# EAGLE board Without_Optos (EAGLE 9.5.0)
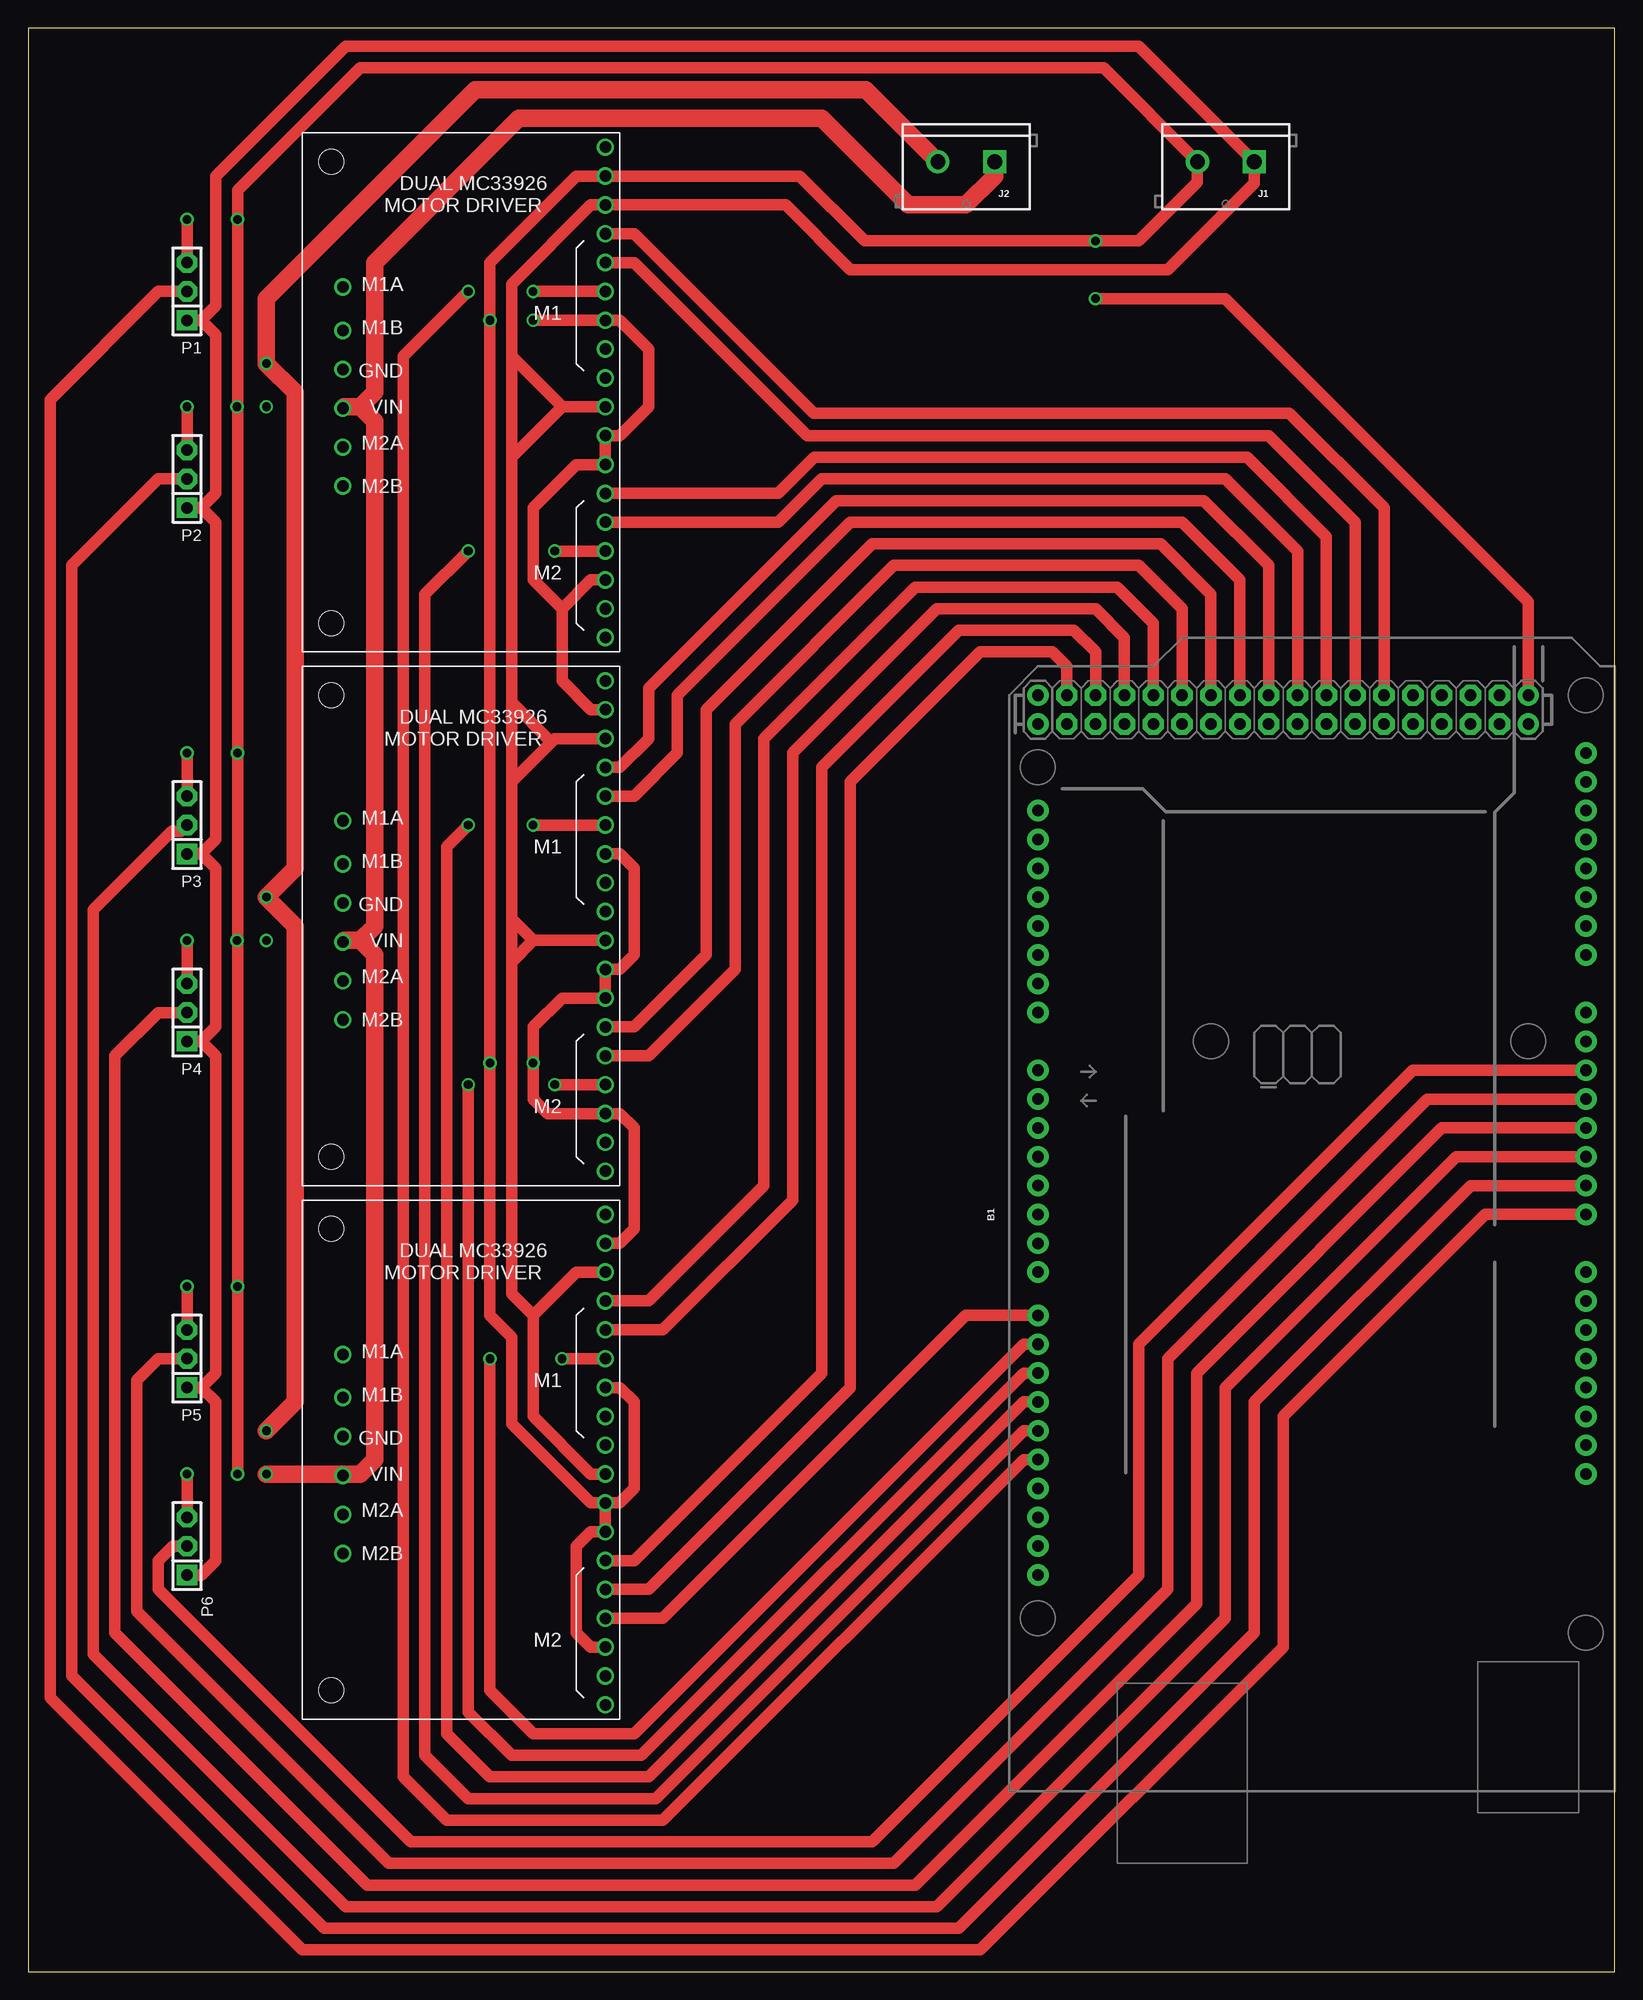
[diagram p0: board, top side]
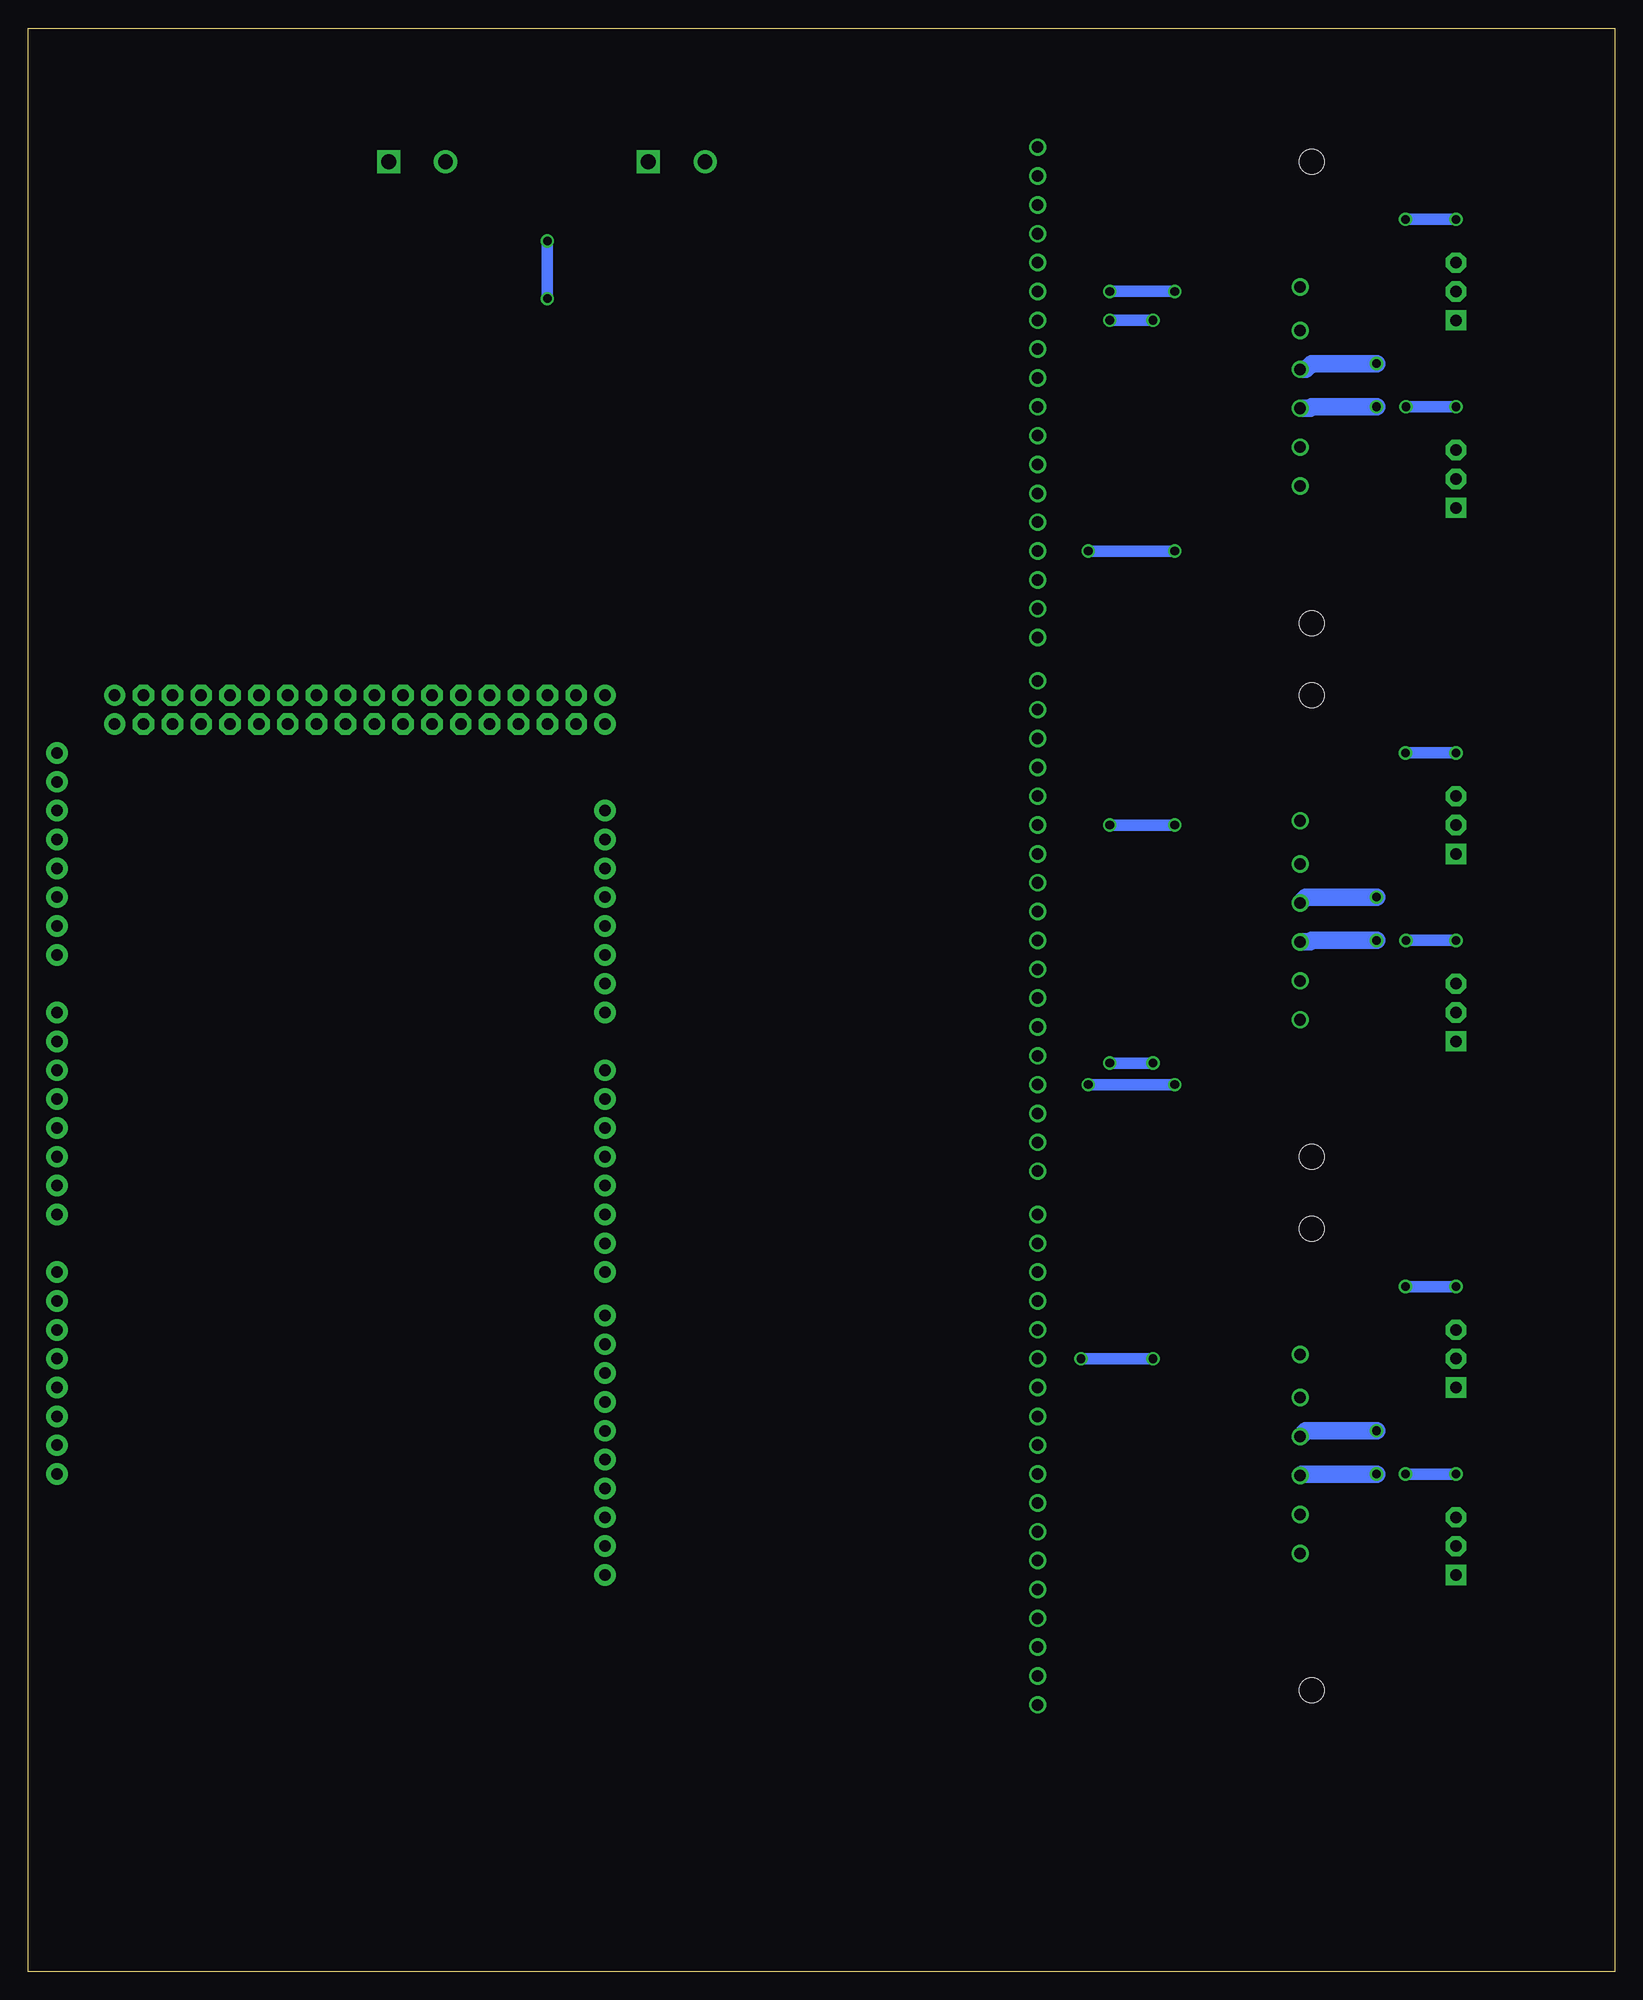
[diagram p1: board, bottom side, seen from below]

Size 139.68 x 171.12 mm. Coordinates in mm from the lower left corner, seen from the top.
Outline: 0,0 139.68,0 139.68,171.12 0,171.12 0,0
Copper layers (1*16): Top 0.035mm / dielectric 1.5mm / Bottom 0.035mm
Design rules "default": minimum track width 6mil, minimum drill 0.35mm, track to track 6mil, track to pad 6mil, pad to pad 6mil, via to via 6mil, smd to smd 6mil, copper to edge 40mil, drill to drill 6mil, minimum pad ring 10mil, minimum via ring 8mil, stop-mask expansion 4mil, vias tented up to drill 0mil, thermal gap 10mil
Net classes: 0 default: width 1.016 mm, drill 0.762 mm, clearance 0.61 mm; 1 12v: width 1.524 mm, drill 0.762 mm, clearance 0.61 mm

## Footprints (pad centres in the part's own frame; a part is rotated, then mirrored left to right if it is on the bottom)
ARDUINO_MEGA_NO_SILK = drill 1.016 pad 1.88: 0 13.97,24.13; 1 11.43,24.13; 2 8.89,24.13; 3 6.35,24.13; 3.3V -13.97,-24.13; 4 3.81,24.13; 5 1.27,24.13; 5V -11.43,-24.13; 5V@1 44.45,24.13; 5V@2 46.99,24.13; 6 -1.27,24.13; 7 -3.81,24.13; 8 -7.62,24.13; 9 -10.16,24.13; 10 -12.7,24.13; 11 -15.24,24.13; 12 -17.78,24.13; 13 -20.32,24.13; 14 19.05,24.13; 15 21.59,24.13; 16 24.13,24.13; 17 26.67,24.13; 18 29.21,24.13; 19 31.75,24.13; 20 34.29,24.13; 21 36.83,24.13; A0 1.27,-24.13; A1 3.81,-24.13; A2 6.35,-24.13; A3 8.89,-24.13; A4 11.43,-24.13; A5 13.97,-24.13; A6 16.51,-24.13; A7 19.05,-24.13; A8 24.13,-24.13; A9 26.67,-24.13; A10 29.21,-24.13; A11 31.75,-24.13; A12 34.29,-24.13; A13 36.83,-24.13; A14 39.37,-24.13; A15 41.91,-24.13; AREF -25.4,24.13; GND -8.89,-24.13; GND@1 -6.35,-24.13; GND@2 44.45,-19.05; GND@3 46.99,-19.05; GND@4 -22.86,24.13; IOREF -19.05,-24.13; NC -21.59,-24.13; RESET -16.51,-24.13; SCL -30.48,24.13; SDA -27.94,24.13; VIN -3.81,-24.13 | drill 1.016 pad 1.88 octagon: 22 44.45,21.59; 23 46.99,21.59; 24 44.45,19.05; 25 46.99,19.05; 26 44.45,16.51; 27 46.99,16.51; 28 44.45,13.97; 29 46.99,13.97; 30 44.45,11.43; 31 46.99,11.43; 32 44.45,8.89; 33 46.99,8.89; 34 44.45,6.35; 35 46.99,6.35; 36 44.45,3.81; 37 46.99,3.81; 38 44.45,1.27; 39 46.99,1.27; 40 44.45,-1.27; 41 46.99,-1.27; 42 44.45,-3.81; 43 46.99,-3.81; 44 44.45,-6.35; 45 46.99,-6.35; 46 44.45,-8.89; 47 46.99,-8.89; 48 44.45,-11.43; 49 46.99,-11.43; 50 44.45,-13.97; 51 46.99,-13.97; 52 44.45,-16.51; 53 46.99,-16.51
SCREWTERMINAL-5MM-2 = drill 1.3 pad 2.032 square: 1 0,0 | drill 1.3 pad 2.032: 2 5,0
SIP-100-03-40 = drill 1.016 pad 1.778 square: 1 -2.54,0 | drill 1.016 pad 1.778 octagon: 2 0,0; 3 2.54,0
DUALMC33926MOTORDRIVERCARRIER = drill 1.016: EN 1.27,24.13; GND 1.27,3.81; INV 1.27,29.21; M1D1 1.27,16.51; M1D2 1.27,13.97; M1FB 1.27,21.59; M1IN1 1.27,11.43; M1IN2 1.27,8.89; M1OUT1 24.384,13.589; M1OUT2 24.384,17.399; M1SF 1.27,19.05; M2D1 1.27,39.37; M2D2 1.27,36.83; M2FB 1.27,44.45; M2IN1 1.27,34.29; M2IN2 1.27,31.75; M2OUT1 24.384,27.686; M2OUT2 24.384,31.115; M2SF 1.27,41.91; MGND 24.384,20.828; MVIN 24.384,24.257; SLEW 1.27,26.67; VDD 1.27,6.35; VIN 1.27,1.27 | hole 2.184: 25.4,2.54; 25.4,43.18

## Placement (x,y rotation side)
B1  ARDUINO_MEGA_R3FULL  [ARDUINO_MEGA_NO_SILK]  113.03,65.41 90 top
J1  [SCREWTERMINAL-5MM-2]  107.95,159.38 180 top
J2  [SCREWTERMINAL-5MM-2]  85.09,159.38 180 top
P1  M-1X03-SIP-100-40  [SIP-100-03-40]  13.97,147.96 90 top
P2  M-1X03-SIP-100-40  [SIP-100-03-40]  13.97,131.44 90 top
P3  M-1X03-SIP-100-40  [SIP-100-03-40]  13.97,100.97 90 top
P4  M-1X03-SIP-100-40  [SIP-100-03-40]  13.97,84.45 90 top
P5  M-1X03-SIP-100-40  [SIP-100-03-40]  13.97,53.98 90 top
P6  M-1X03-SIP-100-40  [SIP-100-03-40]  13.97,37.47 90 top
PH2  DUALMC33926MOTORDRIVERCARRIER  [DUALMC33926MOTORDRIVERCARRIER]  52.07,114.94 180 top
PH3  DUALMC33926MOTORDRIVERCARRIER  [DUALMC33926MOTORDRIVERCARRIER]  52.07,161.93 180 top
U$1  DUALMC33926MOTORDRIVERCARRIER  [DUALMC33926MOTORDRIVERCARRIER]  52.07,67.94 180 top

## Library data of the parts
B1 = SparkFun-Boards
J1 J2 = SparkFun-Connectors; SF_SKU: PRT-08432
P1-P6 = con-headers-jp
PH2 PH3 U$1 = Pololu_Drivers

## Nets
12V [12v]: J2.1 PH2.MVIN PH3.MVIN U$1.MVIN
+5V: J1.1 P1.1 P2.1 P3.1 P4.1 P5.1 P6.1 PH2.EN PH2.VDD PH3.EN PH3.VDD U$1.EN U$1.VDD
GND: B1.GND B1.GND@3 B1.GND@4 J1.2 P1.3 P2.3 P3.3 P4.3 P5.3 P6.3 PH2.GND PH2.INV PH2.M1D1 PH2.M2D1 PH2.SLEW PH3.GND PH3.INV PH3.M1D1 PH3.M2D1 PH3.SLEW U$1.GND U$1.INV U$1.M1D1 U$1.M2D1 U$1.SLEW
M1A: B1.23 U$1.M2IN1
M1B: B1.25 U$1.M2IN2
M1POT: B1.A0 P1.2
M1PWM: B1.8 U$1.M2D2
M2A: B1.27 U$1.M1IN1
M2B: B1.29 U$1.M1IN2
M2POT: B1.A1 P2.2
M2PWM: B1.9 U$1.M1D2
M3A: B1.31 PH2.M2IN1
M3B: B1.33 PH2.M2IN2
M3POT: B1.A2 P3.2
M3PWM: B1.10 PH2.M2D2
M4A: B1.35 PH2.M1IN1
M4B: B1.37 PH2.M1IN2
M4POT: B1.A3 P4.2
M4PWM: B1.11 PH2.M1D2
M5A: B1.39 PH3.M2IN1
M5B: B1.41 PH3.M2IN2
M5POT: B1.A4 P5.2
M5PWM: B1.12 PH3.M2D2
M6A: B1.43 PH3.M1IN1
M6B: B1.45 PH3.M1IN2
M6POT: B1.A5 P6.2
M6PWM: B1.13 PH3.M1D2
PHGND: J2.2 PH2.MGND PH3.MGND U$1.MGND

## Tracks (layer width: path | path; a pad name or v marks a point on that pad's centre or on a via)
12V  (via drill 0.76)
  Top 1.524: v20.95,43.81 29.21,43.81 30.48,45.09 30.48,89.53 29.21,90.81 | 29.21,90.81 27.81,90.81 PH2.MVIN | 29.21,90.81 30.48,92.08 30.48,136.53 29.21,137.79 | 29.21,137.79 27.81,137.79 PH3.MVIN | 29.21,137.79 30.48,139.06 30.48,150.5 43.18,163.19 69.85,163.19 77.47,155.57 82.55,155.57 85.09,158.12 J2.1
  Bottom 1.524: U$1.MVIN 27.56,43.81 v20.95,43.81 | PH2.MVIN 26.8,90.68 26.67,90.81 v20.95,90.81 | PH3.MVIN 26.8,137.67 26.67,137.79 v20.95,137.79
+5V
  Top 1.016: U$1.EN 49.53,43.81 44.45,48.9 44.45,57.78 | 44.45,57.78 48.26,61.59 U$1.VDD | 44.45,57.78 42.55,59.69 42.55,88.9 | 42.55,88.9 42.55,92.71 | 42.55,92.71 42.55,104.78 | PH2.EN 44.45,90.81 | 44.45,90.81 42.55,88.9 | 44.45,90.81 42.55,92.71 | PH2.VDD 46.35,108.58 46.04,108.27 | 42.55,104.78 46.04,108.27 | 42.55,104.78 42.55,111.76 | 46.04,108.27 42.55,111.76 | 42.55,133.35 46.99,137.79 | 46.99,137.79 PH3.EN | 42.55,111.76 42.55,133.35 | 42.55,142.24 42.55,148.59 49.53,155.57 PH3.VDD 66.67,155.57 72.39,149.86 100.33,149.86 107.95,157.48 J1.1 97.79,169.54 27.94,169.54 16.51,158.12 16.51,146.69 15.24,145.41 | 42.55,142.24 42.55,133.35 | 46.99,137.79 42.55,142.24 | 15.24,51.44 16.51,50.16 16.51,36.2 15.24,34.92 P6.1 | 15.24,51.44 16.51,52.7 16.51,80.64 15.24,81.92 | 15.24,81.92 16.51,83.19 16.51,97.16 15.24,98.42 | 15.24,98.42 16.51,99.69 16.51,127.64 15.24,128.91 | 15.24,128.91 16.51,130.18 16.51,144.15 15.24,145.41 | P1.1 15.24,145.41 | P5.1 15.24,51.44 | P4.1 15.24,81.92 | P3.1 15.24,98.42 | P2.1 15.24,128.91
GND  (via drill 0.76)
  Top 1.016: U$1.M2D1 49.53,28.57 48.26,29.84 48.26,37.47 49.53,38.73 U$1.INV U$1.SLEW | U$1.SLEW 52.07,41.27 53.34,42.55 53.34,50.16 52.07,51.44 U$1.M1D1 | U$1.SLEW 49.53,41.27 42.55,48.26 42.55,55.88 40.64,57.78 v40.64,80.01 v40.64,145.41 40.64,150.5 48.26,158.12 PH3.GND 67.94,158.12 73.66,152.4 v93.98,152.4 97.79,152.4 102.95,157.56 J1.2 94.69,167.64 29.21,167.64 18.41,156.84 v18.41,154.31 18.41,137.85 | U$1.GND 52.07,64.14 53.34,65.41 53.34,74.3 52.07,75.56 PH2.M2D1 45.72,75.56 44.45,76.83 v44.45,80.01 44.45,83.19 46.99,85.72 PH2.INV PH2.SLEW 52.07,88.27 53.34,89.53 53.34,97.16 52.07,98.42 PH2.M1D1 | PH2.GND 49.53,111.12 46.99,113.67 46.99,120.02 | 46.99,120.02 49.53,122.56 PH3.M2D1 | 46.99,120.02 44.45,122.56 44.45,128.91 48.26,132.72 PH3.INV PH3.SLEW 52.07,135.25 54.61,137.79 54.61,142.88 52.07,145.41 PH3.M1D1 v44.45,145.41 | P6.3 v13.97,43.81 | v18.41,43.81 v18.41,60.33 18.41,90.86 | 18.41,90.86 v18.41,107.31 18.41,137.85 | P2.3 v13.97,137.79 | P3.3 v13.97,107.31 | P4.3 v13.97,90.81 | v18.36,90.81 18.41,90.86 | P5.3 v13.97,60.33 | v18.36,137.79 18.41,137.85 | P1.3 v13.97,154.31 | v93.98,147.32 105.41,147.32 132.08,120.65 B1.GND@3
  Bottom 1.016: v44.45,145.41 v40.64,145.41 | v18.41,43.81 v13.97,43.81 | v13.97,107.31 v18.41,107.31 | v13.97,90.81 v18.36,90.81 | v18.41,60.33 v13.97,60.33 | v13.97,137.79 v18.36,137.79 | v13.97,154.31 v18.41,154.31 | v44.45,80.01 v40.64,80.01 | v93.98,152.4 v93.98,147.32
M1A
  Top 1.016: B1.23 91.44,114.94 90.17,116.2 83.82,116.2 72.39,104.78 72.39,51.44 54.61,33.66 U$1.M2IN1
M1B
  Top 1.016: B1.25 93.98,116.2 92.08,118.11 81.92,118.11 69.85,106.05 69.85,52.7 53.34,36.2 U$1.M2IN2
M1POT
  Top 1.016: B1.A0 128.27,66.67 110.49,48.9 110.49,28.57 83.82,1.91 24.13,1.91 1.91,24.13 1.91,138.43 11.43,147.96 P1.2
M1PWM
  Top 1.016: B1.8 82.55,57.78 55.88,31.11 U$1.M2D2
M2A
  Top 1.016: B1.27 96.52,117.47 93.98,120.02 80.01,120.02 67.31,107.31 67.31,67.94 55.88,56.52 U$1.M1IN1
M2B
  Top 1.016: B1.29 99.06,118.75 95.89,121.92 78.11,121.92 64.77,108.58 64.77,69.22 54.61,59.05 U$1.M1IN2
M2POT
  Top 1.016: B1.A1 127,69.22 107.95,50.16 107.95,29.84 81.92,3.81 26.04,3.81 3.81,26.04 3.81,123.83 11.43,131.44 P2.2
M2PWM  (via drill 0.76)
  Top 1.016: v40.64,53.98 40.64,24.77 44.45,20.95 53.34,20.95 87.63,55.24 B1.9 | v46.99,53.98 U$1.M1D2
  Bottom 1.016: v40.64,53.98 v46.99,53.98
M3A
  Top 1.016: PH2.M2IN1 54.61,80.64 62.23,88.27 62.23,109.86 76.2,123.83 97.79,123.83 101.6,120.02 B1.31
M3B
  Top 1.016: PH2.M2IN2 53.34,83.19 59.69,89.53 59.69,111.12 74.3,125.73 99.69,125.73 104.14,121.28 B1.33
M3POT
  Top 1.016: B1.A2 125.73,71.75 105.41,51.44 105.41,31.11 80.01,5.71 27.94,5.71 5.71,27.94 5.71,93.53 12.62,100.43 13.44,100.43 P3.2
M3PWM  (via drill 0.76)
  Top 1.016: v38.73,78.11 38.73,22.86 42.55,19.05 53.98,19.05 87.63,52.7 B1.10 | PH2.M2D2 v46.35,78.11
  Bottom 1.016: v46.35,78.11 v38.73,78.11
M4A
  Top 1.016: B1.35 106.68,122.56 101.6,127.64 72.39,127.64 57.15,112.39 57.15,107.31 53.34,103.5 PH2.M1IN1
M4B
  Top 1.016: PH2.M1IN2 52.07,106.05 54.61,108.58 54.61,113.03 71.12,129.54 103.5,129.54 109.22,123.83 B1.37
M4POT
  Top 1.016: B1.A3 124.46,74.3 102.87,52.7 102.87,32.38 78.11,7.62 29.84,7.62 7.62,29.84 7.62,80.64 11.43,84.45 P4.2
M4PWM  (via drill 0.76)
  Top 1.016: v38.73,100.97 36.83,99.06 36.83,20.95 40.64,17.14 54.61,17.14 87.63,50.16 B1.11 | PH2.M1D2 v44.45,100.97
  Bottom 1.016: v44.45,100.97 v38.73,100.97
M5A
  Top 1.016: PH3.M2IN1 66.04,127.64 69.85,131.44 105.41,131.44 111.76,125.09 B1.39
M5B
  Top 1.016: B1.41 114.3,126.36 107.31,133.35 69.22,133.35 66.04,130.18 PH3.M2IN2
M5POT
  Top 1.016: B1.A4 123.19,76.83 100.33,53.98 100.33,33.66 76.2,9.53 31.75,9.53 9.53,31.75 9.53,52.07 11.43,53.98 P5.2
M5PWM  (via drill 0.76)
  Top 1.016: v38.73,125.09 34.92,121.28 34.92,19.05 38.73,15.24 55.24,15.24 87.63,47.62 B1.12 | PH3.M2D2 v46.35,125.09
  Bottom 1.016: v46.35,125.09 v38.73,125.09
M6A
  Top 1.016: B1.43 116.84,127.64 109.22,135.25 68.58,135.25 53.34,150.5 PH3.M1IN1
M6B
  Top 1.016: PH3.M1IN2 53.34,153.03 69.14,137.24 111.05,137.24 119.38,128.91 B1.45
M6POT
  Top 1.016: B1.A5 121.92,79.38 97.79,55.24 97.79,34.92 74.3,11.43 33.66,11.43 11.43,33.66 11.43,36.2 12.7,37.47 P6.2
M6PWM  (via drill 0.76)
  Top 1.016: v38.73,147.96 33.02,142.24 33.02,17.14 36.83,13.34 55.88,13.34 87.63,45.09 B1.13 | PH3.M1D2 v44.45,147.96
  Bottom 1.016: v44.45,147.96 v38.73,147.96
PHGND  (via drill 0.76)
  Top 1.524: v20.95,47.62 23.5,50.16 23.5,92.08 v20.95,94.61 23.5,97.16 23.5,139.06 v20.95,141.6 20.95,147.32 39.37,165.74 73.74,165.74 J2.2
  Bottom 1.524: PH3.MGND 27.18,141.1 26.67,141.6 v20.95,141.6 | PH2.MGND 27.18,94.61 v20.95,94.61 | U$1.MGND 27.18,47.62 v20.95,47.62